# Altium PCB debugging_board_3.PcbDoc
Units mm, origin at the board's own origin, x right, y up, seen from the top; angles counter-clockwise.
Board outline 90.3 x 28.6 mm, 2 copper layers (Top Layer, Bottom Layer), stack 0.96 mm thick; 84 components, 52 nets, 207 pads, 90 vias.
Unrouted connection lines stored in the file: 1.
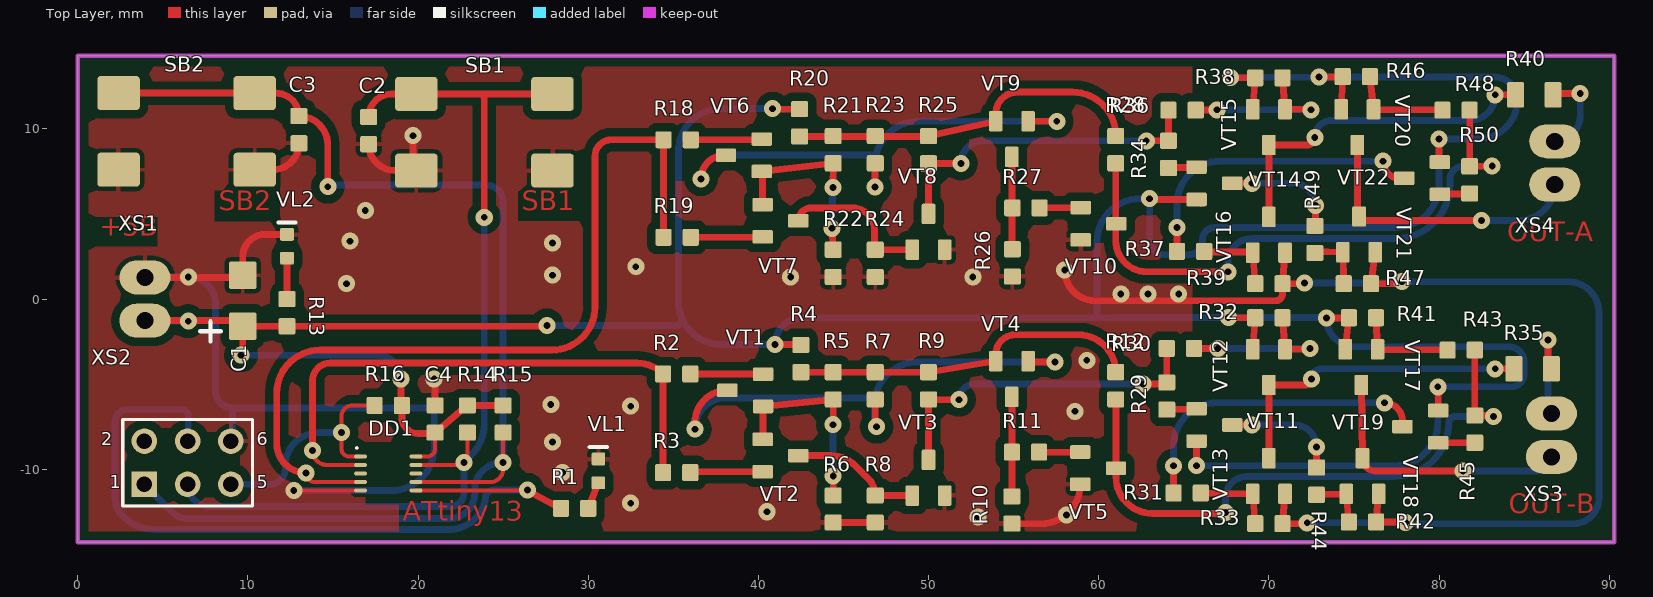
[diagram p0: Top Layer view]
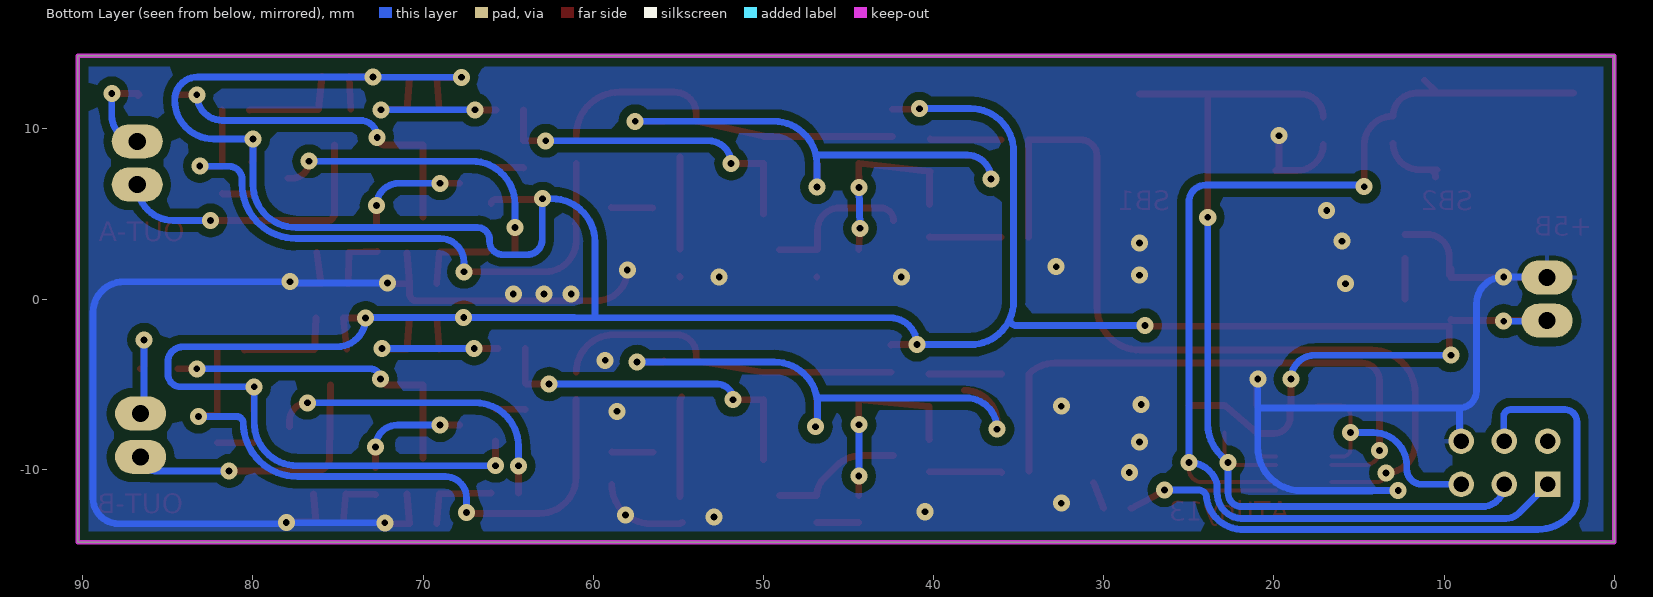
[diagram p1: Bottom Layer view, seen from below]
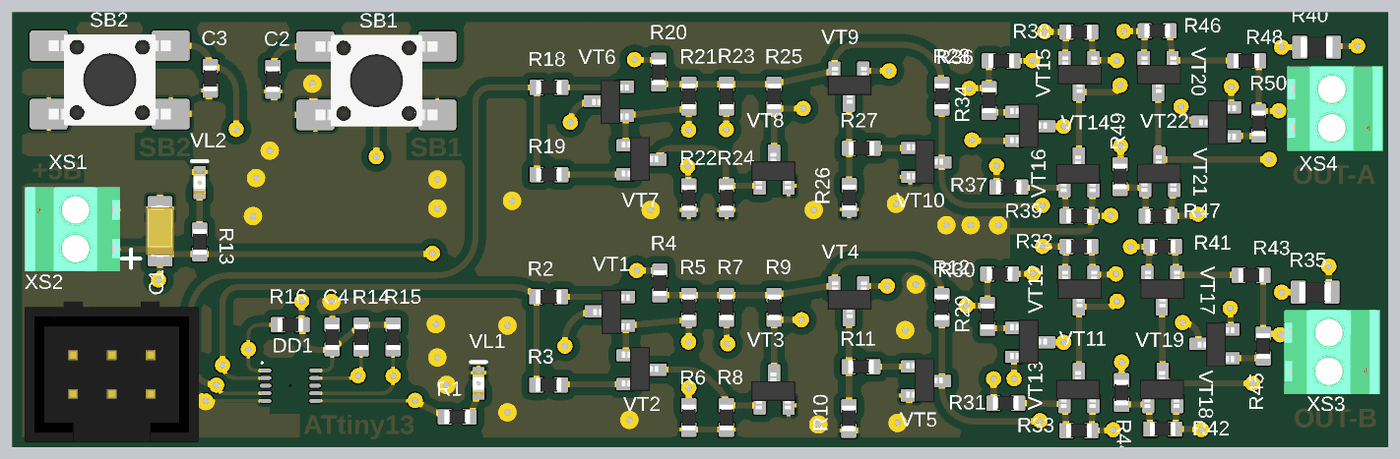
[diagram p2: 3D render of the assembled board from above, using the file's embedded part models]

## Layer stack, top to bottom
Top Solder: solder mask 0.0102, Solder Resist, Dk 3.5
Top Layer: signal copper 0.0356
Dielectric 1: core 0.889, Core-041, Dk 4.8
Bottom Layer: signal copper 0.0356
Bottom Solder: solder mask 0.0102, Solder Resist, Dk 3.5

## Board outline
0,-14.3 90.3,-14.3 90.3,14.3 0,14.3

## Design rules (kind name [scope] priority, off if disabled: settings)
Clearance [All] p1: gap=0.24 ignorepadtopadclearanceinfootprint=FALSE except(0.5: Arc-Poly Track-Poly SMDPad-Poly THPad-Poly Via-Poly Fill-Poly Poly-Poly)
PolygonConnect [All] p1: thpad.connectstyle=Relief thpad.reliefconductorwidth=0.254 thpad.reliefentries=4 thpad.polygonreliefangle="90 Angle" thpad.airgapwidth=0.254 smdpad.connectstyle=Relief smdpad.reliefconductorwidth=0.254 smdpad.reliefentries=4 smdpad.polygonreliefangle="90 Angle" smdpad.airgapwidth=0.254 via.connectstyle=Direct via.reliefconductorwidth=0.254 via.reliefentries=4 via.polygonreliefangle="90 Angle" via.airgapwidth=0.254
RoomDefinition debugging_board_3_MCU [InComponentClass('debugging_board_3_MCU')] p1: confinementstyle=ConfineIn formatcopy=TRUE lockcomponents=FALSE outline 0,-14.25 29.5,-14.25 29.5,14.35 0,14.35
RoomDefinition debugging_board_3_KEY2 [InComponentClass('debugging_board_3_KEY2')] p2: confinementstyle=ConfineIn formatcopy=TRUE lockcomponents=FALSE outline 29.9,0.4 62.125,0.4 62.125,14.05 29.9,14.05
RoomDefinition debugging_board_3_KEY1 [InComponentClass('debugging_board_3_KEY1')] p3: confinementstyle=ConfineIn formatcopy=TRUE lockcomponents=FALSE outline 29.9,-14 62.1,-14 62.1,-0.4 29.9,-0.4
RoomDefinition debugging_board_3_H-bridges [InComponentClass('debugging_board_3_H-bridges')] p4: confinementstyle=ConfineIn formatcopy=TRUE lockcomponents=FALSE outline 62.436,-14.4 90.2,-14.4 90.2,14.2 62.436,14.2
RoutingVias [All] p1: holewidth=0.4 width=1 viastyle="Through Hole" minholewidth=0.4 minwidth=1 maxholewidth=0.4 maxwidth=1
SolderMaskExpansion [All] p1: expansion=0.102 istentingtop=FALSE
Width [All] p1: maxlimit=0.4 minlimit=0.24 preferedwidth=0.3
30 further rules are at their usual default settings.

## Classes and differential pairs
component class debugging_board_3_H-bridges: R29 R30 R31 R32 R33 R34 R35 R36 R37 R38 R39 R40 R41 R42 R43 R44 R45 R46 R47 R48 R49 R50 VT11 VT12 VT13 VT14 VT15 VT16 VT17 VT18 VT19 VT20 VT21 VT22 XS3 XS4
component class debugging_board_3_MCU: C1 C2 C3 C4 DD1 R1 R13 R14 R15 R16 SB1 SB2 VL1 VL2 XS1 XS2
component class debugging_board_3_KEY2: R18 R19 R20 R21 R22 R23 R24 R25 R26 R27 R28 VT6 VT7 VT8 VT9 VT10
component class debugging_board_3_KEY1: R2 R3 R4 R5 R6 R7 R8 R9 R10 R11 R12 VT1 VT2 VT3 VT4 VT5

## Components (designator, comment, footprint, x,y, rotation, side; value= is the part's Value field where it differs from the comment)
C1 "10uF x 10V" TANT_CAP_A(3216) 9.7,-0.1 r90 top
C2 "0,1uF" SMD0603(1005) 17.1,9.9 r90 top
C3 "0,1uF" SMD0603(1005) 13,9.95 r90 top
C4 "0,1uF" SMD0603(1005) 21,-7.05 r90 top
DD1 "ATtiny13-MMU" QFN-10 18.25,-9.65 r0 top
R1 "500" SMD0603(1005) 29.2,-12.3 r180 top
R2 "1k" SMD0603(1005) 35.2,-4.4 r180 top
R3 "1k" SMD0603(1005) 35.2,-10.2 r180 top
R4 "0" SMD0603(1005) 42.5,-3.5 r270 top
R5 "200k" SMD0603(1005) 44.4,-5.1 r270 top
R6 "200k" SMD0603(1005) 44.4,-12.339 r270 top
R7 "20k" SMD0603(1005) 46.869,-5.1 r270 top
R8 "20k" SMD0603(1005) 46.869,-12.339 r270 top
R9 "20k" SMD0603(1005) 50,-5.1 r270 top
R10 "20k" SMD0603(1005) 54.9,-12.4 r270 top
R11 "1k" SMD0603(1005) 55.7,-9 r180 top
R12 "20k" SMD0603(1005) 61,-5.1 r270 top
R13 "500" SMD0603(1005) 12.3,-0.8 r90 top
R14 "20k" SMD0603(1005) 22.9,-7.05 r90 top
R15 "20k" SMD0603(1005) 25,-7.05 r90 top
R16 "20k" SMD0603(1005) 18.25,-6.25 r0 top
R18 "1k" SMD0603(1005) 35.225,9.358 r180 top
R19 "1k" SMD0603(1005) 35.225,3.629 r180 top
R20 "0" SMD0603(1005) 42.425,10.358 r270 top
R21 "200k" SMD0603(1005) 44.4,8.777 r270 top
R22 "200k" SMD0603(1005) 44.4,2.1 r270 top
R23 "20k" SMD0603(1005) 46.869,8.777 r270 top
R24 "20k" SMD0603(1005) 46.869,2.1 r270 top
R25 "20k" SMD0603(1005) 50,8.777 r270 top
R26 "20k" SMD0603(1005) 54.925,2.125 r270 top
R27 "1k" SMD0603(1005) 55.725,5.358 r180 top
R28 "20k" SMD0603(1005) 61,8.777 r270 top
R29 "20k" SMD0603(1005) 64,-5.7 r270 top
R30 "1k" SMD0603(1005) 64.8,-2.9 r180 top
R31 "1k" SMD0603(1005) 65.2,-11.4 r180 top
R32 "100к" SMD0603(1005) 70,-1.1 r180 top
R33 "100к" SMD0603(1005) 70,-13.2 r180 top
R34 "20k" SMD0603(1005) 64.1,8.5 r270 top
R35 "10" SMD0805(2012) 85.5,-4.1 r180 top
R36 "1k" SMD0603(1005) 64.9,11.1 r180 top
R37 "1k" SMD0603(1005) 65.4,2.8 r180 top
R38 "100к" SMD0603(1005) 70,13 r180 top
R39 "100к" SMD0603(1005) 70,0.9 r180 top
R40 "10" SMD0805(2012) 85.6,12 r180 top
R41 "100к" SMD0603(1005) 75.5,-1.1 r180 top
R42 "100к" SMD0603(1005) 75.5,-13.1 r180 top
R43 "1k" SMD0603(1005) 81.3,-3 r180 top
R44 "1k" SMD0603(1005) 72.8,-10.7 r270 top
R45 "20k" SMD0603(1005) 82.1,-7.642 r90 top
R46 "100к" SMD0603(1005) 75.138,13.07 r180 top
R47 "100к" SMD0603(1005) 75.2,0.9 r180 top
R48 "1k" SMD0603(1005) 81,11.1 r180 top
R49 "1k" SMD0603(1005) 72.7,3.5 r270 top
R50 "20k" SMD0603(1005) 81.8,7 r90 top
SB1 "KLS7-TS6604" "KLS7-TS6604 (IT-1102SA)" 23.9,9.8 r90 top
SB2 "KLS7-TS6604" "KLS7-TS6604 (IT-1102SA)" 6.4,9.85 r90 top
VL1 "TO-1608BC-PG" LED_SMD0603(1005) 30.6,-10.1 r90 top
VL2 "TO-1608BC-MRE" LED_SMD0603(1005) 12.3,3.1 r90 top
VT1 "BC856BMTF" SOT23-3 39.227,-5.364 r180 top
VT2 "BC857BMTF" SOT23-3 41.3,-9.2 r0 top
VT3 "BC856BMTF" SOT23-3 50,-10.5 r90 top
VT4 "BC857BMTF" SOT23-3 54.9,-4.7 r270 top
VT5 "BC856BMTF" SOT23-3 59.965,-9.942 r0 top
VT6 "BC856BMTF" SOT23-3 39.15,8.45 r180 top
VT7 "BC857BMTF" SOT23-3 41.3,4.6 r0 top
VT8 "BC856BMTF" SOT23-3 50,3.95 r90 top
VT9 "BC857BMTF" SOT23-3 54.9,9.4 r270 top
VT10 "BC856BMTF" SOT23-3 59.99,4.425 r0 top
VT11 "BC857BMTF" SOT23-3 66.8,-7.4 r0 top
VT12 "IRLML2244TRPBF" SOT23-3 70,-4 r270 top
VT13 "IRLML0040TRPBF" SOT23-3 70,-10.4 r90 top
VT14 "BC857BMTF" SOT23-3 66.8,6.8 r0 top
VT15 "IRLML2244TRPBF" SOT23-3 70,10.1 r270 top
VT16 "IRLML0040TRPBF" SOT23-3 70,3.775 r90 top
VT17 "IRLML2244TRPBF" SOT23-3 75.438,-4 r270 top
VT18 "IRLML0040TRPBF" SOT23-3 75.5,-10.4 r90 top
VT19 "BC857BMTF" SOT23-3 78.9,-7.5 r180 top
VT20 "IRLML2244TRPBF" SOT23-3 75.2,10.1 r270 top
VT21 "IRLML0040TRPBF" SOT23-3 75.3,3.8 r90 top
VT22 "BC857BMTF" SOT23-3 79,7.1 r180 top
XS1 "Клемник винтовой" XS_2x2.54MM 3.95,0 r90 top
XS2 "IDC-6" "IDC-6 (2.54)" 3.92,-10.89 r0 top
XS3 "Клемник винтовой" XS_2x2.54MM 86.605,-8 r270 top
XS4 "Клемник винтовой" XS_2x2.54MM 86.8,8 r270 top

## Footprints (in the part's own frame and the unit in brackets; to place one, negate y for a bottom-side part, rotate by r counter-clockwise, add the part's x,y. Pads: shape width x height; smd on the part's side, far side on the other; paste and mask are expansions set on the pad)
"IDC-6 (2.54)" [mm]
  rect 1.5x1.5 hole 0.9: 1(0,0)
  round 1.5 hole 0.9: 2(0,2.54) 3(2.54,0) 4(2.54,2.54) 5(5.08,0) 6(5.08,2.54)
  silkscreen extent -1.27,-1.27 6.35,3.81, body extent -3.1,-3.07 8.33,6.2, height 9.27
"KLS7-TS6604 (IT-1102SA)" [mm]
  rrect20% 2x2.5 smd: 1(-2.25,4) 1(-2.25,-4) 2(2.25,4) 2(2.25,-4)
  body extent -3,-4 3,4, height 5
LED_SMD0603(1005) [mm] "Chip Resistor, Body 0.6x0.3mm, IPC Medium Density"
  rrect20% 0.75x0.8 smd: 1(-0.7,0) 2(0.7,0)
  silkscreen extent 1.4,-0.5 1.4,0.5, body extent -0.8,-0.4 0.8,0.4, height 0.55
QFN-10 [mm]
  oval 0.75x0.25 smd: 1(-1.625,0.4) 2(-1.625,-0.1) 3(-1.625,-0.6) 4(-1.625,-1.1) 5(-1.625,-1.6) 6(1.625,-1.6) 7(1.625,-1.1) 8(1.625,-0.6) 9(1.625,-0.1) 10(1.625,0.4)
  rect 0x0 smd: 11(0,-0.6)
  silkscreen extent -1.9,0.85 -1.8,0.95, body extent -1.55,-2.15 1.55,0.95, height 1
SMD0603(1005) [mm] "Chip Resistor, Body 0.6x0.3mm, IPC Medium Density"
  rrect20% 0.95x1 smd: 1(-0.8,0) 2(0.8,0)
  body extent -0.85,-0.45 0.85,0.45, height 0.55
SMD0805(2012) [mm] "Chip Resistor, Body 0.6x0.3mm, IPC Medium Density"
  rrect20% 1x1.5 smd: 1(-1.1,0) 2(1.1,0)
  body extent -1.05,-0.68 1.05,0.67, height 0.6
SOT23-3 [mm]
  rrect20% 1.2x0.8 smd: 1(-1.05,0.95) 2(-1.05,-0.95) 3(1.05,0)
  body extent -1.3,-1.4 1.1,1.5, height 1
TANT_CAP_A(3216) [mm]
  rrect10% 1.6x1.6 smd: 1(-1.5,0) 2(1.5,0)
  silkscreen extent -2.4,1.3 -1.2,2.5, body extent -1.7,-0.9 1.7,0.9, height 1.8
XS_2x2.54MM [mm]
  oval 2x3 hole 1: 1(-1.27,0) 2(1.27,0)
  body extent -2.73,-3.12 2.8,3.15, height 8.5

## Part data
C1: Package="SMD A", ValueBOM="Конденсатор танталовый 10мкФ х 10В SMD A", Type=C
C2 C3 C4: Package=SMD0603, ValueBOM="Конденсатор керамический 0,1мкФ SMD 0603 1%", Type=C
DD1: Package=DFN-10, ValueBOM="Микроконтроллер ATtiny13-MMU", Type=DD
R1 R13: Package=SMD0603, ValueBOM="Резистор 500 Ом SMD 0603 1%", Type=R
R2 R3 R11 R18 R19 R27 R30 R31 R36 R37 R43 R44 R48 R49: Package=SMD0603, ValueBOM="Резистор 1кОм SMD 0603 1%", Type=R
R4 R20: Package=SMD0603, ValueBOM="Резистор 0 Ом SMD 0603 1%", Type=R
R5 R6 R21 R22: Package=SMD0603, ValueBOM="Резистор 200кОм SMD 0603 1%", Type=R
R7 R8 R9 R10 R12 R14 R15 R16 R23 R24 R25 R26 R28 R29 R34 R45 R50: Package=SMD0603, ValueBOM="Резистор 20кОм SMD 0603 1%", Type=R
R32 R33 R38 R39 R41 R42 R46 R47: Package=SMD0603, ValueBOM="Резистор 100кОм SMD 0603 1%", Type=R
R35 R40: Package=SMD0805, ValueBOM="Резистор 10 Ом SMD 0805 1%", Type=R
SB1 SB2: Package="SMD 6х6х5mm", ValueBOM="KLS7-TS6604-5.0-180 (IT-1102SA), Кнопка тактовая 6х6х5мм SMD", Type=SB
VL1: Package=SMD0603, ValueBOM="Светодиод Зелёный TO-1608BC-PG SMD0603", Light=Зелёный, Type=VL
VL2: Package=SMD0603, ValueBOM="Светодиод Красный TO-1608BC-MRE SMD0603", Light=Красный, Type=VL
VT1 VT3 VT5 VT6 VT8 VT10: library part VT_NPN_SOT23_3, Package=SOT-23, ValueBOM="Транзистор биполярный NPN BC856BMTF SOT23", Type=VT
VT2 VT4 VT7 VT9 VT11 VT14 VT19 VT22: library part VT_PNP_SOT23_3, Package=SOT-23, ValueBOM="Транзистор биполярный PNP BC857BMTF SOT23", Type=VT
VT12 VT15 VT17 VT20: library part VT_P_MOSFET_SOT23_3, Package=SOT-23, ValueBOM="Транзистор p-МОП IRLML2244TRPBF SOT23", Type=VT
VT13 VT16 VT18 VT21: library part VT_N_MOSFET_SOT23_3, Package=SOT-23, ValueBOM="Транзистор n-МОП IRLML0040TRPBF SOT23", Type=VT
XS1 XS3 XS4: library part "Клемник винтовой 2-контактный, 2,54мм", Package=2,54mm, ValueBOM="308-021-14, Клеммник винтовой, 2-контактный, 2.54мм, прямой", Type=XS
XS2: library part ISP_connector

## Via types
v1: diameter 1, hole 0.4, Top Layer to Bottom Layer, 90 vias

## Nets (pads, with @x,y where several pads share a name; then routed paths per layer and width w, separated by ;. In a path a pad name is that pad's centre, name@x,y a point inside that pad or via, vN(x,y) a via of type N, cw(c..) or ccw(c..) an arc to the next point about the centre after c; other vN are vias at no path point)
+5V: C1.1 C4.1 DD1.10 R4.1 R13.1 R14.2 R15.2 R16.2 R20.1 R32.2 R38.2 R41.2 R46.2 VT11.2 VT12.2 VT14.2 VT15.2 VT17.2 VT19.2 VT20.2 VT22.2 XS1.1 XS2.2 | length 232.9
  Top Layer w0.24: DD1.10 20.55,-9.25 ccw(c20.55,-8.8) 21,-8.8 C4.1
  Top Layer w0.4: XS1.1 9.6,-1.27 C1.1@9.6,-1.2 ; v1(9.6,-3.3) ccw(c9.6,-3.2) 9.7,-3.2 C1.1 R13.1 27.528,-1.6 ccw(c27.528,-1.554) v1(27.574,-1.554) ; v1(19,-4.7) 19,-6.2 ccw(c19.05,-6.2) R16.2 19.05,-6.95 ccw(c20,-6.95) 20,-7.9 20.95,-7.9 ccw(c20.95,-7.85) C4.1 R14.2 R15.2 ; v1(40.839,11.184) ccw(c40.865,11.184) 40.865,11.158 R20.1 ; v1(40.982,-2.678) 42.478,-2.678 cw(c42.478,-2.7) R4.1 ; v1(62.979,5.898) ccw(c63.027,5.898) 63.027,5.85 VT14.2 cw(c65.75,5.6) VT14.2@66,5.6 ; v1(65.739,-9.793) 65.75,-9.793 VT11.2 ; v1(67.615,-1.093) 67.615,-1.1 R32.2 VT12.2 ; v1(67.752,13.031) ccw(c67.783,13.031) 67.783,13 R38.2 VT15.2 ; v1(72.951,13.051) 74.319,13.051 ccw(c74.319,13.07) R46.2@74.338,13.068 ; v1(73.383,-1.12) 74.68,-1.12 ccw(c74.68,-1.1) R41.2@74.699,-1.105 ; VT20.2 R46.2@74.338,13.068 ; VT17.2 R41.2@74.699,-1.105 ; v1(79.929,-5.16) cw(c79.929,-5.181) 79.95,-5.181 VT19.2 ; v1(80,9.4) 80,8.1 ccw(c80.05,8.1) VT22.2 ; R46.2@74.338,13.068 ccw(c74.319,13.07) R46.2 R46.2@74.338,13.068 ; R41.2@74.699,-1.105 ccw(c74.68,-1.1) R41.2 R41.2@74.699,-1.105
  Bottom Layer w0.4: XS1.1 ccw(c3.98,-1.27) 3.98,-1.3 v1(6.5,-1.3) ; v1(9.6,-3.3) 17.6,-3.3 cw(c17.6,-4.7) v1(19,-4.7) ; v1(27.574,-1.554) 35.161,-1.554 ccw(c35.161,-1.188) 35.527,-1.188 ; v1(40.839,11.184) 40.839,11.2 37.84,11.2 ccw(c37.84,8.66) 35.3,8.66 35.3,-0.138 ccw(c37.84,-0.138) 35.527,-1.188 ; v1@40.961,-2.7 ccw(c40.961,-2.678) v1(40.982,-2.678) ; v1(65.739,-9.793) 77.389,-9.793 ccw(c77.389,-7.253) 79.929,-7.253 v1(79.929,-5.16) 84.24,-5.16 ccw(c84.24,-4.4) 85,-4.4 85,-3.7 ccw(c84.1,-3.7) 84.1,-2.8 75.063,-2.8 cw(c75.063,-1.12) v1(73.383,-1.12) ccw(c73.356,-1.12) 73.356,-1.093 v1(67.615,-1.093) 61.1,-1.093 61.1,-1.1 59.9,-1.1 ; v1(67.752,13.031) 72.932,13.031 ccw(c72.932,13.051) v1(72.951,13.051) ; v1@73.066,13.166 v1(72.951,13.051) ; 35.527,-1.188 ccw(c37.84,-0.138) 37.84,-2.678 v1(40.982,-2.678) ; v1(40.982,-2.678) cw(c42.561,-2.678) 42.561,-1.1 59.9,-1.1 ; 59.9,-1.1 59.9,3.358 cw(c62.44,3.358) 62.44,5.898 v1(62.979,5.898) cw(c62.979,5.877) 63,5.877 63,3.5 ccw(c63.9,3.5) 63.9,2.6 65.3,2.6 ccw(c65.3,3.4) 66.1,3.4 66.1,3.5 cw(c66.8,3.5) 66.8,4.2 77.46,4.2 ccw(c77.46,6.74) 80,6.74 v1(80,9.4) 82.3,9.4 ccw(c82.3,11.7) 84.6,11.7 ccw(c83.249,11.7) 83.249,13.051 v1(72.951,13.051)
GND: C1.2 C2.1 C3.1 C4.2 DD1.5 R6.2 R8.2 R10.2 R22.2 R24.2 R26.2 R33.1 R39.1 R42.1 R47.1 SB1.1 SB2.1 VL1.2 VL2.2 VT3.2 VT5.2 VT8.2 VT10.2 VT13.2 VT16.2 VT18.2 VT21.2 XS1.2 XS2.6 | length 149.3
  Top Layer w0.24: v1(12.7,-11.26) 12.7,-11.4 cw(c12.85,-11.4) 12.85,-11.25 DD1.5
  Top Layer w0.4: XS1.2 9.6,1.27 C1.2@9.6,1.8 ; C1.2 9.7,2.5 cw(c11,2.5) 11,3.8 VL2.2 ; SB2.1@10.4,7.6 SB2.1@10.925,7.6 ; SB2.1@10.5,7.175 cw(c10.925,7.175) SB2.1@10.925,7.6 ; C3.1 cw(c11.45,9.15) 11.45,7.6 SB2.1@10.925,7.6 ; C2.1 ccw(c18.65,9.1) 18.65,7.55 19.9,7.55 cw(c19.9,7.75) 19.7,7.75 v1(19.7,9.6) ; v1(20.951,-4.7) cw(c20.951,-4.749) 21,-4.749 C4.2 ; R6.2 R8.2 ; R10.2@54.753,-13.139 cw(c54.753,-13.347) R10.2 56.607,-13.2 ccw(c56.607,-10.892) VT5.2 ; R26.2@54.9,1.3 ccw(c54.9,1.325) R26.2 ; v1(58,1.7) ccw(c59.8,1.699) 59.8,-0.1 70.4,-0.1 ccw(c70.4,0.3) 70.8,0.3 R39.1 ; VT13.2 R33.1 72.203,-13.2 ccw(c72.203,-13.148) v1(72.255,-13.148) ; VT16.2 R39.1 ; v1(72.09,0.936) cw(c72.054,0.936) 72.054,0.9 R39.1 ; VT21.2 R47.1 77.709,0.9 ccw(c77.709,1.019) v1(77.828,1.019) ; VT18.2 R42.1 78.009,-13.1 cw(c78.009,-13.133) v1(78.042,-13.133)
  Bottom Layer w0.4: XS1.2 cw(c3.98,1.27) 3.98,1.3 v1(6.5,1.3) cw(c6.5,-0.3) 8.1,-0.3 8.1,-5.4 ccw(c9.1,-5.4) 9.1,-6.4 ; XS2.6 ccw(c9,-8.25) 9.1,-8.25 9.1,-6.4 ; v1(12.7,-11.26) 18.411,-11.26 ccw(c18.411,-8.72) 20.951,-8.72 20.951,-6.4 ; v1(20.951,-4.7) 20.951,-6.4 ; v1(72.09,0.936) 77.745,0.936 ccw(c77.745,1.019) v1(77.828,1.019) 87.581,1.019 cw(c87.581,-0.8) 89.4,-0.8 89.4,-11.7 cw(c87.9,-11.7) 87.9,-13.2 78.109,-13.2 cw(c78.109,-13.133) v1(78.042,-13.133) 78.042,-13.148 v1(72.255,-13.148) ; 9.1,-6.4 20.951,-6.4
  other v1: 52.9,-12.8 58.1,-12.7 40.5,-12.5 32.5,-12 28.5,-10.2 27.9,-8.4 58.6,-6.6 32.5,-6.3 27.8,-6.2 59.3,-3.6 61.299,0.301 62.899,0.301 64.699,0.301 15.8,0.9 41.9,1.3 52.6,1.3 27.9,1.4 32.8,1.9 27.9,3.3 16,3.4 16.9,5.2
MISO: C3.2 DD1.7 R15.1 SB2.2 XS2.1 | length 76.2
  Top Layer w0.24: DD1.7 24.25,-10.75 ccw(c24.25,-10) 25,-10 v1(25,-9.6) R15.1
  Top Layer w0.4: SB2.2@2.4,12.1 SB2.2@10.4,12.1 ; SB2.2@11.156,12.856 SB2.2@10.4,12.1 ; v1(14.7,6.6) 14.7,9.05 ccw(c13,9.05) C3.2 ccw(c11.65,10.75) 11.65,12.1 SB2.2@10.4,12.1
  Bottom Layer w0.4: XS2.1 5.61,-12.58 ccw(c6.382,-11.809) 6.382,-12.9 21.933,-12.9 ccw(c21.837,-11.4) 23.34,-11.4 23.34,-10.933 cw(c23.74,-10.933) 23.358,-10.816 cw(c25,-11.317) v1(25,-9.6) ; v1(14.7,6.6) cw(c14.8,6.6) 14.8,6.7 24,6.7 cw(c24,5.7) 25,5.7 v1(25,-9.6) ; 24.14,-9.851 cw(c25,-11.2) v1(25,-9.6)
MOSI: DD1.6 R1.2 XS2.4 | length 46.1
  Top Layer w0.24: DD1.6 26.407,-11.25 ccw(c26.407,-11.219) v1(26.438,-11.219)
  Top Layer w0.4: v1@26.407,-11.25 26.418,-11.256 R1.2
  Bottom Layer w0.4: XS2.4 ccw(c6.46,-8.31) 6.5,-8.31 6.5,-6.9 ccw(c6.1,-6.9) 6.1,-6.5 2.9,-6.5 ccw(c2.9,-7.2) 2.2,-7.2 2.2,-11.734 ccw(c3.566,-11.734) 2.6,-12.7 2.696,-12.796 ccw(c4.492,-11) 4.492,-13.54 21.952,-13.54 ccw(c21.837,-11.4) 23.941,-11.808 23.948,-11.808 ccw(c21.4,-11.4) 23.97,-11.623 cw(c24.369,-11.658) 24.12,-11.345 cw(c24.481,-11.8) 24.481,-11.219 v1(26.438,-11.219)
NetDD1_2: DD1.2 R2.2 R3.2 | length 34.5
  Top Layer w0.24: v1(13.8,-8.9) ccw(c14.65,-8.9) 14.65,-9.75 DD1.2
  Top Layer w0.4: v1(13.8,-8.9) 13.8,-4.8 cw(c14.84,-4.8) 14.84,-3.76 32.854,-3.76 cw(c32.854,-5.946) R2.2 R3.2@34.4,-10.1
NetDD1_4: DD1.4 R18.2 R19.2 | length 50
  Top Layer w0.24: v1@13.43,-10.23 v1(13.415,-10.215) ccw(c13.95,-10.215) 13.95,-10.75 DD1.4
  Top Layer w0.4: v1(13.415,-10.215) cw(c13.415,-8.5) 11.7,-8.5 11.7,-5.54 cw(c14.24,-5.54) 14.24,-3 27.86,-3 ccw(c27.86,-0.46) 30.4,-0.46 30.4,8.4 cw(c31.358,8.4) 31.358,9.358 31.925,9.358 R18.2 R19.2
NetR1_1: R1.1 VL1.1 | length 1.6
  Top Layer w0.4: R1.1 VL1.1
NetR2_1: R2.1 VT1.2 | length 4.3
  Top Layer w0.4: R2.1 40.277,-4.4 VT1.2
NetR3_1: R3.1 VT2.2 | length 4.3
  Top Layer w0.4: R3.1 36.05,-10.15 VT2.2
NetR4_2: R4.2 R5.1 R7.1 R9.1 R12.1 VT4.2 | length 20.8
  Top Layer w0.4: R4.2 R5.1 R7.1 R9.1 VT4.2@53.85,-3.65 ; VT4.2 53.95,-3.25 cw(c55.1,-3.25) 55.1,-2.1 58.8,-2.1 cw(c58.8,-4.3) R12.1
NetR5_2: R5.2 R6.1 VT1.1 VT2.1 | length 11.8
  Top Layer w0.4: VT2.1 ccw(c40.25,-8.223) 40.277,-8.223 VT1.1 R5.2 44.4,-7.383 v1(44.385,-7.383) ; R6.1 v1(44.4,-10.4)
  Bottom Layer w0.4: v1(44.385,-7.383) 44.385,-10.4 v1(44.4,-10.4)
NetR7_2: R7.2 VT1.3 VT4.1 | length 32
  Top Layer w0.4: v1(36.27,-7.65) 36.27,-7.272 cw(c38.177,-7.272) VT1.3 ; R7.2@46.816,-5.953 cw(c46.869,-5.953) R7.2 46.869,-7.431 cw(c46.8,-7.431) 46.8,-7.5 v1(46.95,-7.5) ; VT4.1 ccw(c55.904,-3.65) 55.904,-3.704 v1(57.43,-3.704)
  Bottom Layer w0.4: v1@36.326,-7.593 ccw(c36.326,-7.65) v1(36.27,-7.65) cw(c38.11,-7.65) 38.11,-5.809 46.853,-5.809 ; v1(46.95,-7.5) 46.816,-7.366 46.816,-6.244 cw(c49.356,-6.244) 46.853,-5.809 ; v1(57.43,-3.704) 49.356,-3.704 ccw(c49.356,-6.244) 46.853,-5.809
NetR8_1: R8.1 VT2.3 VT3.1 | length 7.9
  Top Layer w0.4: VT2.3 44.251,-9.2 cw(c44.251,-11.249) 45.7,-9.8 46.466,-10.566 cw(c45.493,-11.539) R8.1 VT3.1
NetR9_2: R9.2 R29.1 R30.2 VT3.3 | length 20
  Top Layer w0.4: VT3.3 R9.2@50,-5.916 ; R9.2 R9.2@50,-5.916 ; v1(51.79,-5.916) R9.2@50,-5.916 ; v1(62.6,-5) 63.9,-5 ccw(c63.9,-4.9) R29.1 ; R29.1@64,-4.8 R30.2
  Bottom Layer w0.4: v1(51.79,-5.916) cw(c52.706,-5.916) 52.706,-5 v1(62.6,-5)
NetR10_1: R10.1 R11.2 VT4.3 | length 5.9
  Top Layer w0.4: VT4.3@54.8,-5.75 cw(c54.559,-5.991) 54.9,-5.991 R11.2 R10.1
NetR11_1: R11.1 VT5.1 | length 2.4
  Top Layer w0.4: R11.1 58.907,-9 VT5.1
NetR12_2: R12.2 R43.1 R45.2 VT5.3 | length 36.5
  Top Layer w0.4: R12.2 cw(c60.964,-5.936) 61.015,-5.936 VT5.3 61.015,-10.46 ccw(c63.155,-10.46) 63.155,-12.6 67.4,-12.6 v1(67.45,-12.55) ; R43.1 R45.2 83.142,-6.842 cw(c83.142,-6.9) v1(83.2,-6.9)
  Bottom Layer w0.4: v1(67.45,-12.55) 67.45,-11.683 cw(c68.7,-11.683) 68.7,-10.433 77.389,-10.433 ccw(c77.389,-7.253) 80.569,-7.293 cw(c80.969,-7.3) 80.967,-6.9 v1(83.2,-6.9)
NetR13_2: R13.2 VL2.1 | length 2.4
  Top Layer w0.4: R13.2 VL2.1
NetR18_1: R18.1 VT6.2 | length 4.2
  Top Layer w0.4: R18.1 40.099,9.358 ccw(c40.099,9.501) VT6.2
NetR19_1: R19.1 VT7.2 | length 4.2
  Top Layer w0.4: R19.1 40.199,3.629 ccw(c40.199,3.701) VT7.2
NetR20_2: R20.2 R21.1 R23.1 R25.1 R28.1 VT9.2 | length 21.3
  Top Layer w0.4: R20.2 49.981,9.558 ccw(c49.981,9.577) R25.1 VT9.2 53.95,10.883 cw(c55.225,10.883) 55.225,12.158 58.46,12.158 cw(c58.46,9.618) 61,9.618 R28.1
NetR21_2: R21.2 R22.1 VT6.1 VT7.1 | length 11.3
  Top Layer w0.4: VT7.1 40.25,7.379 ccw(c40.079,7.379) VT6.1 R21.2 v1(44.389,6.557) ; v1(44.325,4.158) R22.1
  Bottom Layer w0.4: v1(44.325,4.158) v1(44.389,6.557)
NetR23_2: R23.2 VT6.3 VT9.1 | length 29.9
  Top Layer w0.4: v1(36.625,7.058) cw(c38.017,7.058) 38.017,8.45 VT6.3 ; v1(46.858,6.586) 46.858,7.977 R23.2 ; VT9.1 57.539,10.45 v1(57.539,10.442)
  Bottom Layer w0.4: v1(36.625,7.058) cw(c38.026,7.058) 38.026,8.459 46.92,8.459 ; v1(46.858,6.586) 46.858,7.902 cw(c49.398,7.902) 46.92,8.459 ; v1(57.539,10.442) 49.398,10.442 ccw(c49.398,7.902) 46.92,8.459
NetR24_1: R24.1 VT7.3 VT8.1 | length 9
  Top Layer w0.4: VT7.3 cw(c43.108,4.6) 43.108,5.358 45.525,5.358 cw(c45.525,4.058) 46.825,4.058 46.825,2.944 ccw(c46.869,2.944) R24.1 VT8.1
NetR25_2: R25.2 R34.1 R36.2 VT8.3 | length 19.6
  Top Layer w0.4: VT8.3 R25.2@50,7.971 ; R25.2 R25.2@50,7.971 ; v1(51.901,7.971) R25.2@50,7.971 ; v1(62.8,9.3) R34.1 R36.2
  Bottom Layer w0.4: v1(51.901,7.971) cw(c53.23,7.971) 53.23,9.3 v1(62.8,9.3)
NetR26_1: R26.1 R27.2 VT9.3 | length 5.4
  Top Layer w0.4: VT9.3 54.912,8.338 54.912,2.937 R26.1
NetR27_1: R27.1 VT10.1 | length 2.4
  Top Layer w0.4: R27.1 56.533,5.367 58.931,5.367 VT10.1
NetR28_2: R28.2 R48.1 R50.2 VT10.3 | length 36.4
  Top Layer w0.4: R28.2 VT10.3@61,4.465 ; VT10.3 cw(c61.04,4.465) VT10.3@61,4.465 ; v1(67.6,1.6) 62.84,1.6 cw(c62.84,3.44) 61,3.44 VT10.3@61,4.465 ; R48.1 R50.2 83.102,7.8 ccw(c83.102,7.824) v1(83.125,7.824)
  Bottom Layer w0.4: v1(67.6,1.6) 67.6,2.16 cw(c69,2.16) 69,3.56 77.46,3.56 ccw(c77.46,6.74) 80.64,6.74 80.64,7.04 cw(c81.4,7.04) 81.4,7.8 83,7.8 cw(c83,7.7) v1@83.1,7.7
NetR29_2: R29.2 VT11.1 | length 1.8
  Top Layer w0.4: R29.2 64.025,-6.475 65.725,-6.475 VT11.1
NetR30_1: R30.1 R32.1 VT12.1 | length 10.6
  Top Layer w0.4: R30.1 v1(67,-2.9) ; R32.1 VT12.1 72.512,-2.95 ccw(c72.512,-2.932) 72.53,-2.932 72.499,-2.9 v1(72.424,-2.9)
  Bottom Layer w0.4: v1(67,-2.9) v1@72.499,-2.9 ; v1(72.424,-2.9) v1@72.499,-2.9 ; v1@72.499,-2.9 cw(c72.499,-2.932) 72.53,-2.932 v1@72.499,-2.9
NetR31_1: R31.1 R33.2 VT13.1 | length 4.8
  Top Layer w0.4: R31.1 VT13.1 R33.2
NetR31_2: R31.2 VT19.3 | length 18.6
  Top Layer w0.4: R31.2 v1(64.4,-9.8) ; v1(76.8,-6.1) cw(c76.8,-7.15) 77.85,-7.15 VT19.3
  Bottom Layer w0.4: v1(64.4,-9.8) 64.4,-8.64 cw(c66.94,-8.64) 66.94,-6.1 v1(76.8,-6.1)
NetR34_2: R34.2 VT14.1 | length 1.7
  Top Layer w0.4: R34.2 64.125,7.725 65.725,7.725 VT14.1
NetR35_1: R35.1 XS3.1 | length 6.3
  Top Layer w0.4: XS3.1@86.603,-6.727 XS3.1 ; R35.1@86.603,-4.103 R35.1 cw(c86.6,-3.9) 86.4,-3.9 v1(86.4,-2.4) v1@86.606,-2.4
  Bottom Layer w0.4: XS3.1@86.4,-6.7 v1(86.4,-2.4)
NetR35_2: R35.2 VT12.3 VT13.3 | length 19.2
  Top Layer w0.4: VT13.3 VT12.3 72.15,-5.05 ccw(c72.15,-4.7) v1(72.5,-4.7) ; v1(83.3,-4.1) R35.2
  Bottom Layer w0.4: v1(72.5,-4.7) cw(c73.1,-4.7) 73.1,-4.1 v1(83.3,-4.1)
NetR36_1: R36.1 R38.1 VT15.1 | length 10.2
  Top Layer w0.4: R36.1 66.933,11.1 ccw(c66.933,11.122) v1(66.956,11.122) ; R38.1 VT15.1 72.449,11.15 cw(c72.449,11.122) v1(72.476,11.122)
  Bottom Layer w0.4: v1(66.956,11.122) v1(72.476,11.122)
NetR37_1: R37.1 R39.2 VT16.1 | length 4.7
  Top Layer w0.4: R37.1 66.238,2.762 69.012,2.762 VT16.1 R39.2
NetR37_2: R37.2 VT22.3 | length 18.1
  Top Layer w0.4: R37.2 v1(64.6,4.2) ; v1(76.7,8.1) ccw(c77.7,8.1) 77.7,7.1 VT22.3
  Bottom Layer w0.4: v1(64.6,4.2) 64.6,5.56 cw(c67.14,5.56) 67.14,8.1 v1(76.7,8.1)
NetR40_1: R40.1 XS4.1 | length 5.4
  Top Layer w0.4: XS4.1@86.75,9.32 XS4.1 ; R40.1@86.75,11.95 R40.1 cw(c86.776,12) 86.776,12.076 v1(88.296,12.076)
  Bottom Layer w0.4: XS4.1 ccw(c86.8,10.766) 88.296,10.766 v1(88.296,12.076)
NetR40_2: R40.2 VT15.3 VT16.3 | length 20.6
  Top Layer w0.4: VT16.3 VT15.3 72.25,9.05 ccw(c72.25,9.5) v1(72.7,9.5) ; v1(83.3,12) R40.2
  Bottom Layer w0.4: v1(72.7,9.5) cw(c73.7,9.5) 73.7,10.5 81.8,10.5 ccw(c81.8,12) v1(83.3,12) v1@83.185,11.885
NetR41_1: R41.1 R43.2 VT17.1 | length 6
  Top Layer w0.4: R41.1 VT17.1 76.413,-2.975 80.475,-2.975 R43.2
NetR42_2: R42.2 R44.2 VT18.1 | length 3.4
  Top Layer w0.4: R44.2 72.825,-11.475 74.525,-11.475 VT18.1 R42.2
NetR44_1: R44.1 VT11.3 | length 6.9
  Top Layer w0.4: VT11.3 v1(69,-7.4) ; R44.1 v1(72.8,-8.7)
  Bottom Layer w0.4: v1(69,-7.4) 71.5,-7.4 cw(c71.5,-8.7) v1(72.8,-8.7)
NetR45_1: R45.1 VT19.1 | length 2.2
  Top Layer w0.4: VT19.1 79.954,-8.446 82.096,-8.446 R45.1
NetR46_1: R46.1 R48.2 VT20.1 | length 6
  Top Layer w0.4: R46.1 VT20.1 76.175,11.125 80.175,11.125 R48.2
NetR47_2: R47.2 R49.2 VT21.1 | length 3.5
  Top Layer w0.4: R49.2@72.7,2.8 VT21.1 R47.2
NetR49_1: R49.1 VT14.3 | length 6.8
  Top Layer w0.4: VT14.3 v1(69,6.8) ; R49.1 ccw(c72.7,4.333) 72.733,4.333 v1(72.733,5.504)
  Bottom Layer w0.4: v1(69,6.8) 71.437,6.8 cw(c71.437,5.504) v1(72.733,5.504)
NetR50_1: R50.1 VT22.1 | length 1.8
  Top Layer w0.4: VT22.1 80.075,6.175 81.775,6.175 R50.1
NetVT17_3: VT17.3 VT18.3 XS3.2 | length 16.3
  Top Layer w0.4: VT17.3 VT18.3 ccw(c76.25,-9.35) 76.25,-10.1 v1(81.4,-10.1)
  Bottom Layer w0.4: v1(81.4,-10.1) 85.775,-10.1 ccw(c85.775,-9.27) XS3.2
NetVT20_3: VT20.3 VT21.3 XS4.2 | length 17.1
  Top Layer w0.4: VT20.3 75.2,4.95 ccw(c75.3,4.95) VT21.3 ccw(c75.529,4.85) 75.529,4.621 v1(82.493,4.621)
  Bottom Layer w0.4: v1(82.493,4.621) 84.691,4.621 ccw(c84.691,6.73) XS4.2
RESET: DD1.1 R16.1 XS2.5 | length 13.9
  Top Layer w0.24: DD1.1 15.95,-9.25 cw(c15.95,-8.8) 15.5,-8.8 v1(15.5,-7.85) 15.5,-6.9 cw(c16.15,-6.9) 16.15,-6.25 R16.1
  Bottom Layer w0.4: XS2.5 11.3,-10.89 ccw(c11.3,-9.99) 12.2,-9.99 12.2,-9.8 cw(c14.15,-9.8) 14.15,-7.85 v1(15.5,-7.85)
SCK: C2.2 DD1.9 R14.1 SB1.2 XS2.3 | length 57.7
  Top Layer w0.24: DD1.9 22.35,-9.75 ccw(c22.35,-9.2) 22.9,-9.2 R14.1
  Top Layer w0.4: C2.2 cw(c18.45,10.7) 18.45,12.05 19.9,12.05 23.6,12.05 ; v1(23.891,4.802) 23.891,11.759 ccw(c23.6,11.759) 23.6,12.05 ; SB1.2@27.9,12.05 23.6,12.05
  Bottom Layer w0.4: XS2.3 ccw(c7.77,-10.89) 7.77,-12.2 21.9,-12.2 ccw(c21.9,-11.4) 22.7,-11.4 v1(22.7,-9.6) 23.147,-9.153 ccw(c21.351,-7.357) 23.891,-7.357 v1(23.891,4.802)
pads on no net: DD1.3 DD1.8 DD1.11

## Polygon pours and split planes (outlines as drawn)
GND on Bottom Layer "NONET_L-01_P-001" (solid, pour order 0): 0,14.3 0,-14.3 90.3,-14.3 90.3,14.3
GND on Top Layer "NONET_L-01_P-001" (solid, pour order 1): 0,14.3 0,-14.3 65.5,-14.3 65.5,14.3

## Keep-outs
Keep-Out Layer:
  the board outline again, w0.254

## Other copper
Top Layer:
  text "SB2" at 8.3,4.824 h2
  text "SB1" at 26.1,4.824 h2
  text "+5B" at 1.3,3.324 h2
  text "OUT-A" at 84,3.024 h2
  text "OUT-B" at 84.1,-12.976 h2
  text "ATtiny13" at 19.1,-13.422 h2

## Text inside footprints (layer, text, board x,y; h text height)
XS2: Top Overlay "6" at 10.524,-8.858 h1.27; Top Overlay "5" at 10.524,-11.398 h1.27; Top Overlay "2" at 1.38,-8.858 h1.27; Top Overlay "1" at 1.888,-11.398 h1.27